# Altium PCB Power-second_Ver0.1.PcbDoc
Units mil, origin at the board's own origin, x right, y up, seen from the top; angles counter-clockwise.
Board outline 4173.23 x 2165.35 mil, 2 copper layers (Top Layer, Bottom Layer); 5 components, 0 nets, 92 pads, 0 vias.
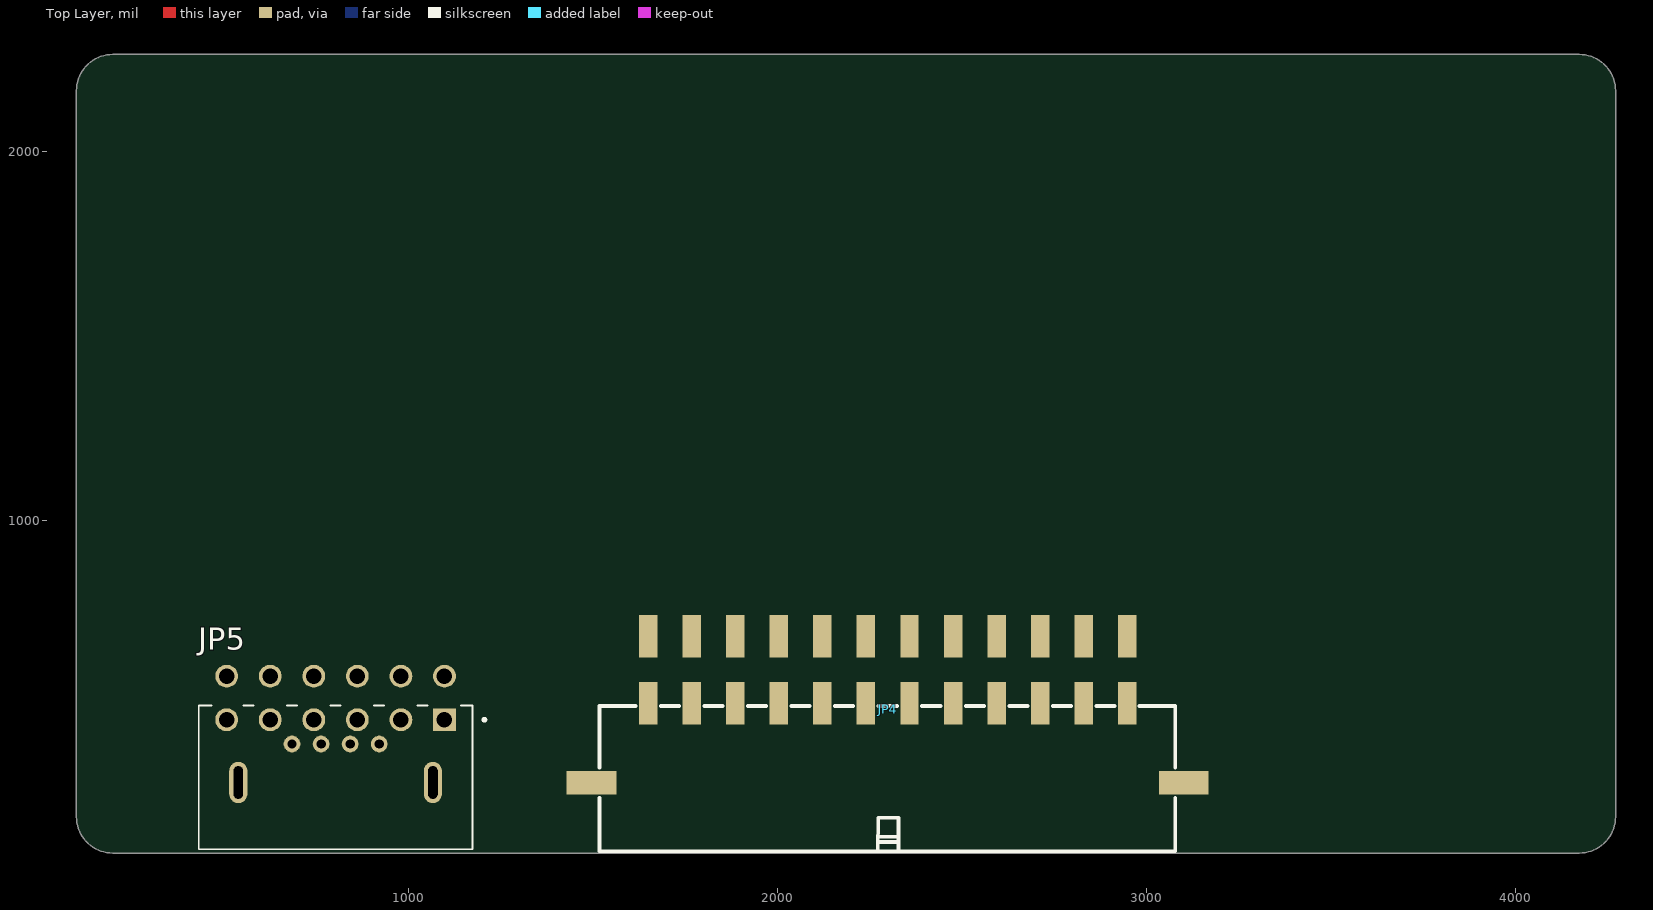
[diagram p0: Top Layer view]
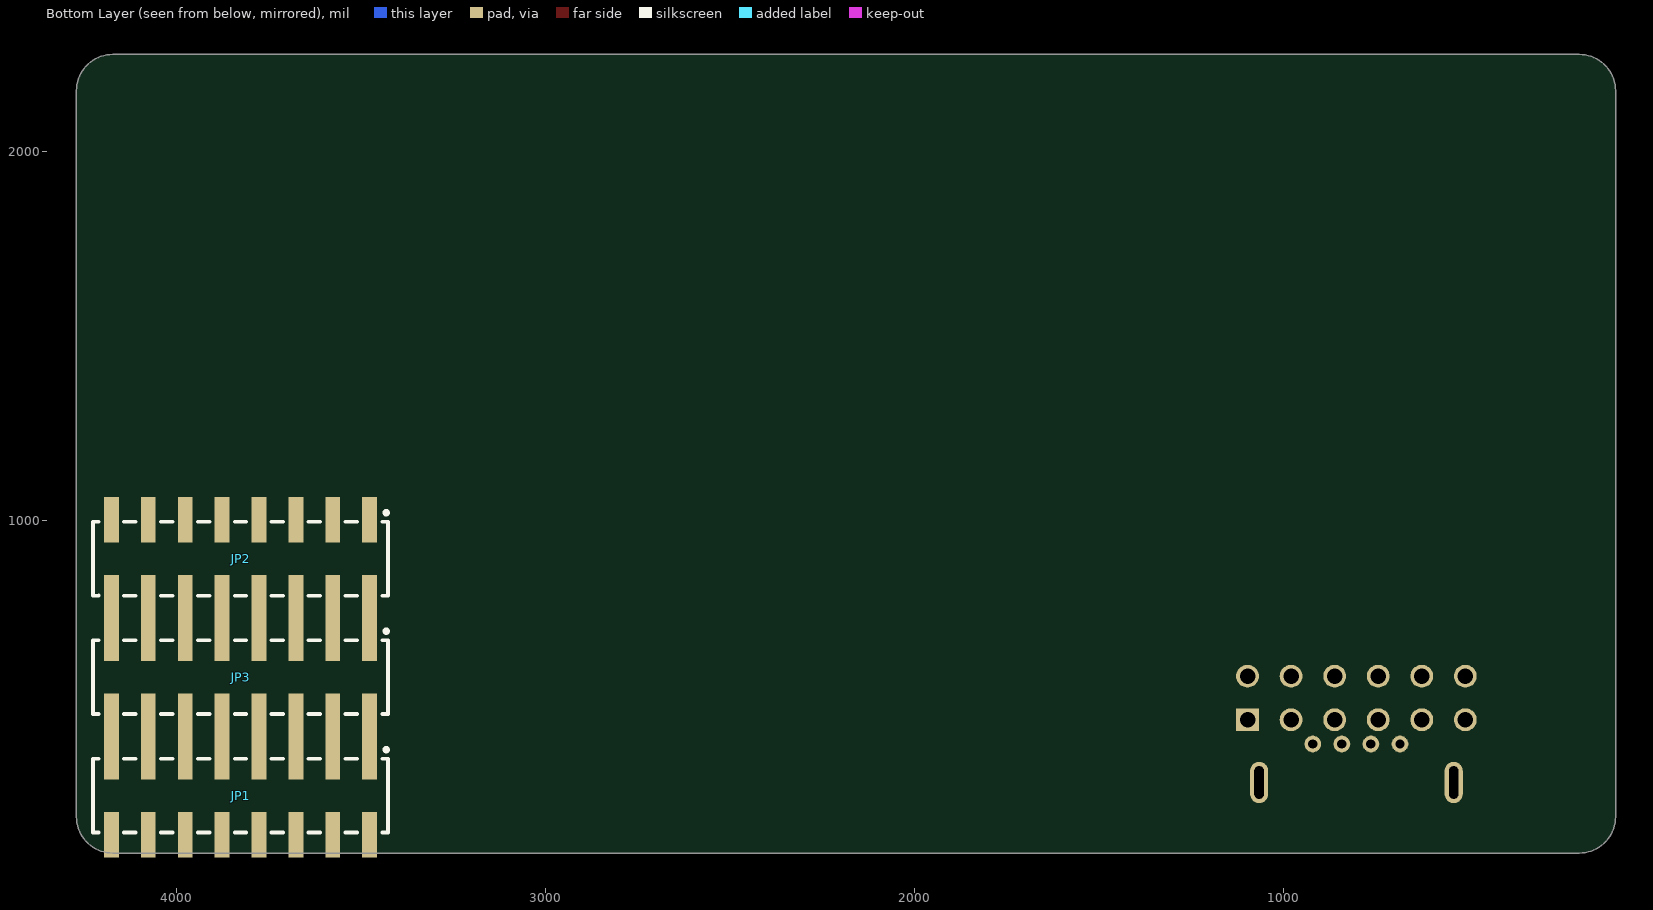
[diagram p1: Bottom Layer view, seen from below]

## Layer stack, top to bottom
Top Solder: solder mask 0.4, Solder Resist, Dk 3.5
Top Layer: signal copper 1.4
Dielectric 1: dielectric 12.6, FR-4, Dk 4.8
Bottom Layer: signal copper 1.4
Bottom Solder: solder mask 0.4, Solder Resist, Dk 3.5

## Board outline
98.68,197.1 98.68,2165.6 cw(c197.1,2165.6) 197.1,2264.03 4173.48,2264.03 cw(c4173.48,2165.6) 4271.9,2165.6 4271.9,197.1 cw(c4173.48,197.1) 4173.48,98.68 197.1,98.68 cw(c197.1,197.1)

## Design rules (kind name [scope] priority, off if disabled: settings)
Clearance [All] p1: gap=10 ignorepadtopadclearanceinfootprint=FALSE except(0: Arc-Hole Track-Hole SMDPad-Hole THPad-Hole Via-Hole Fill-Hole Poly-Hole Region-Hole Text-Hole)
PolygonConnect [All] p1: connectstyle=Relief reliefconductorwidth=10 reliefentries=4 polygonreliefangle="90 Angle" airgapwidth=10
RoutingVias [All] p1: holewidth=28 width=50 viastyle="Through Hole" minholewidth=28 minwidth=50 maxholewidth=28 maxwidth=50
SolderMaskExpansion [All] p1: expansion=4 istentingtop=FALSE
Width [All] p1: maxlimit=10 minlimit=10 preferedwidth=10
30 further rules are at their usual default settings.

## Components (designator, comment, footprint, x,y, rotation, side; value= is the part's Value field where it differs from the comment)
JP1 "Header 8X2" "2.54 2x8P 贴片排针" 3827,253.91 r0 bottom
JP2 "Header 8X2" "2.54 2x8P 贴片排针" 3827,896.5 r0 bottom
JP3 "Header 8X2" "2.54 2x8P 贴片排针" 3827,575.21 r0 bottom
JP4 "Header 2X11" CONN-SMD_24P-P3.00_XKB_C3030WRS-2X12D-LPSW 2298.38,488.07 r0 top
JP5 "Header 6X2" AMPHENOL_10164279-124121LF 801.22,290 r0 top

## Footprints (in the part's own frame and the unit in brackets; to place one, negate y for a bottom-side part, rotate by r counter-clockwise, add the part's x,y. Pads: shape width x height; smd on the part's side, far side on the other; paste and mask are expansions set on the pad)
"2.54 2x8P 贴片排针" [mm] "2.54 2x8P 贴片排针"
  rect 1.02x3.12 smd paste+0.051: 1(-8.89,-2.69) 2(-8.89,2.69) 3(-6.35,-2.69) 4(-6.35,2.69) 5(-3.81,-2.69) 6(-3.81,2.69) 7(-1.27,-2.69) 8(-1.27,2.69) 9(1.27,-2.69) 10(1.27,2.69) 11(3.81,-2.69) 12(3.81,2.69) 13(6.35,-2.69) 14(6.35,2.69) 15(8.89,-2.69) 16(8.89,2.69)
  silkscreen extent -10.16,-3.3 10.16,2.53, body extent -10.16,-3.75 10.16,3.75, height 9.8
AMPHENOL_10164279-124121LF [mm]
  rect 1.57x1.57 / inner round 1.57 / far side rect 1.57x1.57 hole 1.07 mask+0.102: 1(7.5,4.32)
  round 1.57 hole 1.07 mask+0.102: 2(4.5,4.32) 3(1.5,4.32) 4(-1.5,4.32) 5(-4.5,4.32) 6(-7.5,4.32) 7(7.5,7.32) 8(4.5,7.32) 9(1.5,7.32) 10(-1.5,7.32) 11(-4.5,7.32) 12(-7.5,7.32)
  round 1.15 hole 0.65 mask+0.102: S1(3,2.65) S2(1,2.65) S3(-1,2.65) S4(-3,2.65)
  oval 1.25x2.85 hole 0.65 slot 2.25 at 90 deg mask+0.102: SH1(6.7,0) SH2(-6.7,0)
  silkscreen extent -9.43,-4.6 10.35,5.31, body extent -9.43,-4.6 9.43,7.64, height 11.21
CONN-SMD_24P-P3.00_XKB_C3030WRS-2X12D-LPSW [mm]
  rect 1.27x2.92 smd paste+0: 1(16.5,0.43) 2(13.5,0.43) 3(10.5,0.43) 4(7.5,0.43) 5(4.5,0.43) 6(1.5,0.43) 7(-1.5,0.43) 8(-4.5,0.43) 9(-7.5,0.43) 10(-10.5,0.43) 11(-13.5,0.43) 12(-16.5,0.43) 13(16.5,5.05) 14(13.5,5.05) 15(10.5,5.05) 16(7.5,5.05) 17(4.5,5.05) 18(1.5,5.05) 19(-1.5,5.05) 20(-4.5,5.05) 21(-7.5,5.05) 22(-10.5,5.05) 23(-13.5,5.05) 24(-16.5,5.05)
  rect 3.43x1.65 smd paste+0: 25(-20.395,-5.05) 26(20.395,-5.05)
  silkscreen extent -19.85,-9.77 19.81,0.23, body extent -21.12,-9.6 21.12,6.2, height 8.75

## Part data
JP1 JP2 JP3: "8*2P接插件", BOM名称=8*2P接插件, 学习资源=www.ooocke.com, 版权归属=源创客
JP4: library part "Header 12X2", "12*2P接插件", BOM名称=12*2P接插件, 学习资源=www.ooocke.com, 版权归属=源创客
JP5: library part "Header  6X2", "6*2P接插件", BOM名称=6*2P接插件, 学习资源=www.ooocke.com, 版权归属=源创客

## Nets (pads, with @x,y where several pads share a name; then routed paths per layer and width w, separated by ;. In a path a pad name is that pad's centre, name@x,y a point inside that pad or via, vN(x,y) a via of type N, cw(c..) or ccw(c..) an arc to the next point about the centre after c; other vN are vias at no path point)
pads on no net: JP1.1 JP1.2 JP1.3 JP1.4 JP1.5 JP1.6 JP1.7 JP1.8 JP1.9 JP1.10 JP1.11 JP1.12 JP1.13 JP1.14 JP1.15 JP1.16 JP2.1 JP2.2 JP2.3 JP2.4 JP2.5 JP2.6 JP2.7 JP2.8 JP2.9 JP2.10 JP2.11 JP2.12 JP2.13 JP2.14 JP2.15 JP2.16 JP3.1 JP3.2 JP3.3 JP3.4 JP3.5 JP3.6 JP3.7 JP3.8 JP3.9 JP3.10 JP3.11 JP3.12 JP3.13 JP3.14 JP3.15 JP3.16 JP4.1 JP4.2 JP4.3 JP4.4 JP4.5 JP4.6 JP4.7 JP4.8 JP4.9 JP4.10 JP4.11 JP4.12 JP4.13 JP4.14 JP4.15 JP4.16 JP4.17 JP4.18 JP4.19 JP4.20 JP4.21 JP4.22 JP4.23 JP4.24 JP4.25 JP4.26 JP5.1 JP5.2 JP5.3 JP5.4 JP5.5 JP5.6 JP5.7 JP5.8 JP5.9 JP5.10 JP5.11 JP5.12 JP5.S1 JP5.S2 JP5.S3 JP5.S4 JP5.SH1 JP5.SH2

## Silkscreen, mask and mechanical layers (free items; w line width, h text height)
Mechanical 1:
  the board outline again, w0.5